# EAGLE board untitle2d (EAGLE 9.6.2)
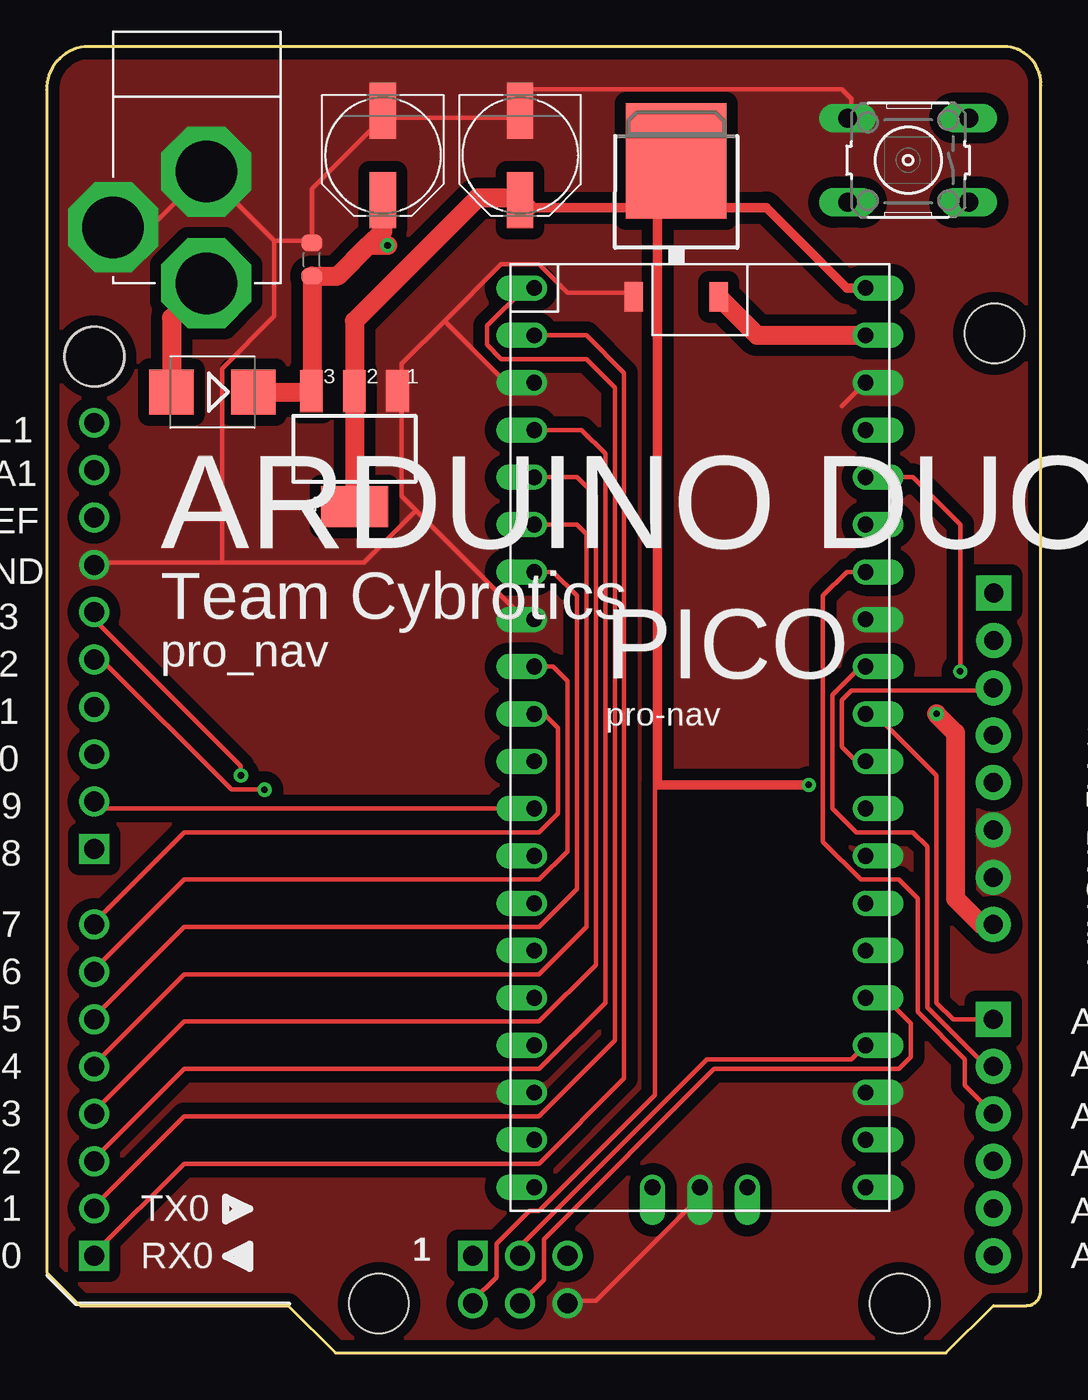
[diagram p0: board, top side]
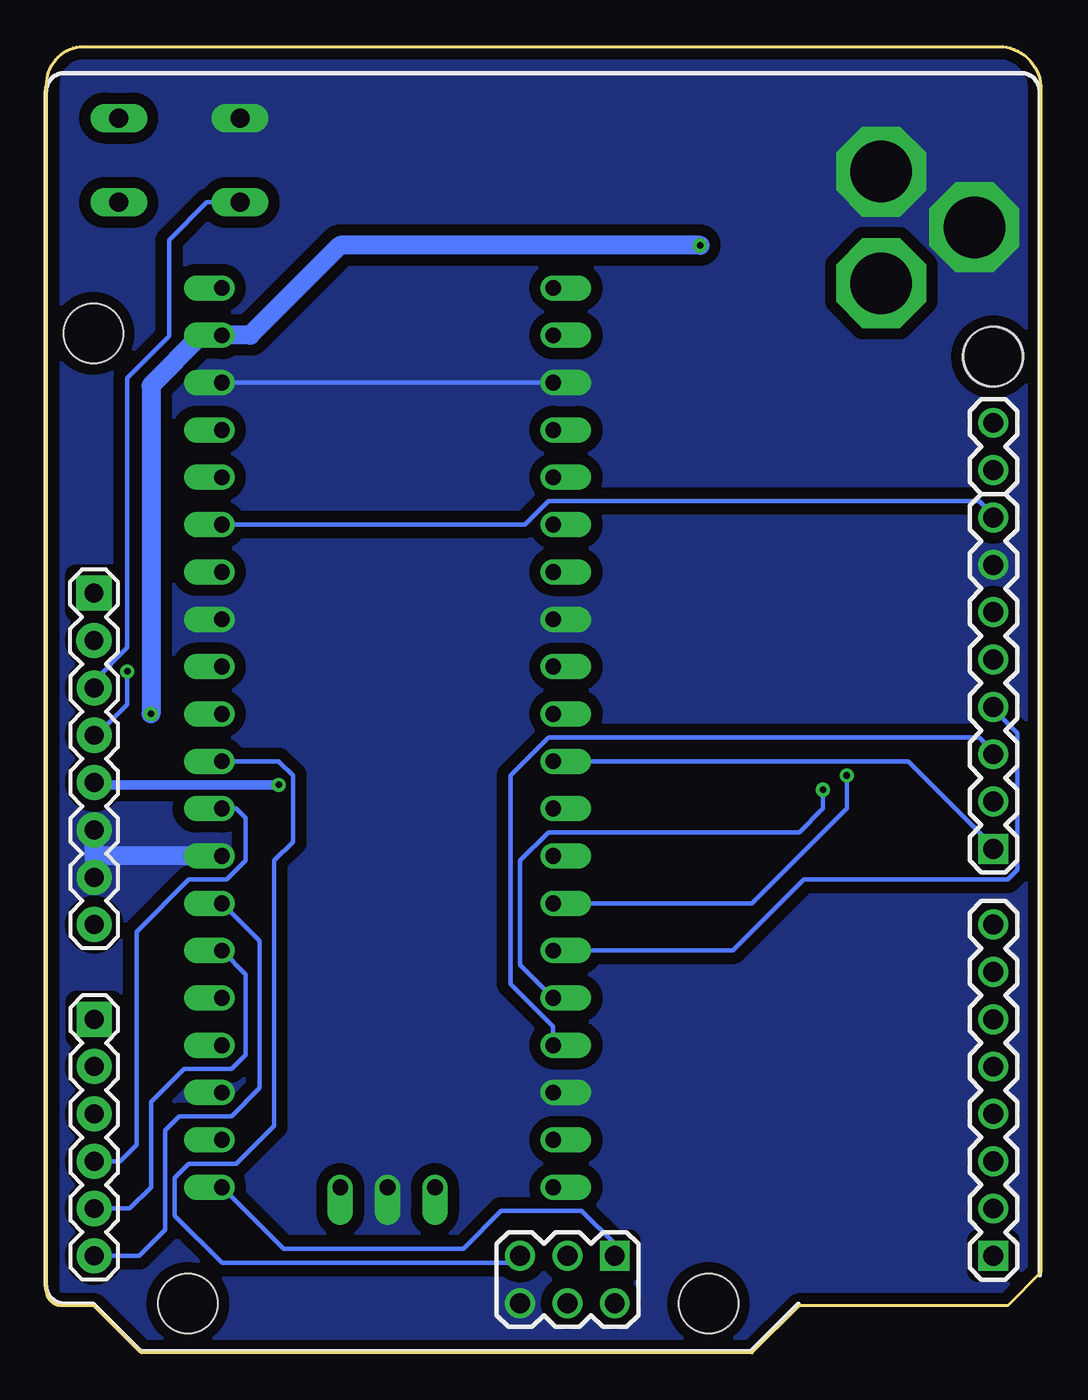
[diagram p1: board, bottom side, seen from below]

Size 53.37 x 70.1 mm. Coordinates in mm from the lower left corner, seen from the top.
Outline: 0.01,4.32 1.79,2.54 12.97,2.54 15.51,0 48.27,0 50.81,2.54 52.59,2.54 arc90 53.35,3.3 53.35,67.82 arc90 51.58,70.1 2.05,70.1 arc90 0.01,67.56 0.01,4.32
Copper layers (1*16): Top 0.035mm / dielectric 1.5mm / Bottom 0.035mm
Design rules "default *": minimum track width 10mil, minimum drill 0.35mm, track to track 10mil, track to pad 10mil, pad to pad 6mil, via to via 6mil, smd to smd 6mil, copper to edge 20mil, drill to drill 10mil, minimum pad ring 10mil, minimum via ring 8mil, stop-mask expansion 4mil, vias tented up to drill 0mil, thermal gap 10mil
Net classes: 0 default: width 0.15 mm, drill 0.3 mm, clearance 0.15 mm

## Footprints (pad centres in the part's own frame; a part is rotated, then mirrored left to right if it is on the bottom)
C0603-ROUND = smd 0.898 x 1.1: 1 -0.889,0; 2 0.889,0
SMB = smd 2.4 x 2.4: A 2.2,0; C -2.2,0
SOT223 = smd 1.219 x 2.235: 1 -2.311,-3.099; 2 0,-3.099; 3 2.311,-3.099 | smd 3.6 x 2.2: 4 0,3.099
DPACK = smd 1 x 1.6: 1 -2.28,-4.8; 3 2.28,-4.8 | smd 5.4 x 6.2: 2 0,2.5
PANASONIC_D = smd 3 x 1.4: + 2.4,0; - -2.4,0
B3F-10XX = drill 1.016 long: 1 -3.251,2.261; 2 3.251,2.261; 3 -3.251,-2.261; 4 3.251,-2.261
ARDUINO_UNO = drill 1.067 square: 0 -27.686,-8.763; 8 -27.686,13.081; MISO -7.366,-8.763 | drill 1.067: 1 -27.686,-6.223; 2 -27.686,-3.683; 3 -27.686,-1.143; 4 -27.686,1.397; 5 -27.686,3.937; 5V_2 -7.366,-11.303; 6 -27.686,6.477; 7 -27.686,9.017; 9 -27.686,15.621; 10 -27.686,18.161; 11 -27.686,20.701; 12 -27.686,23.241; 13 -27.686,25.781; AREF -27.686,30.861; GND_4 -27.686,28.321; GND_5 -2.286,-11.303; MASTER_RESET_SPI -2.286,-8.763; MOSI -4.826,-11.303; SCL1 -27.686,35.941; SDA1 -27.686,33.401; SPCK -4.826,-8.763 | drill 1.016 pad 1.88: 3V3 20.574,19.177; 5V0 20.574,16.637; A1 20.574,1.397; A2 20.574,-1.143; A3 20.574,-3.683; A4 20.574,-6.223; A5 20.574,-8.763; GND 20.574,14.097; GND_1 20.574,11.557; IOREF 20.587,24.264; RESET 20.575,21.717; VIN 20.574,9.017 | drill 1.016 pad 1.88 square: A0 20.574,3.937; NC_2 20.587,26.804 | hole 3.2: -27.686,39.497; -27.635,39.472; 20.625,40.742; -12.395,-11.328; 15.545,-11.328
PICO = drill 0.85 offset: 3V3 8.89,12.7; 3V3_EN 8.89,15.24; ADC_VREF 8.89,10.16; AGND 8.89,5.08; GND 8.89,17.78; GND_0 -8.89,17.78; GND_1 -8.89,-7.62; GND_2 8.89,-20.32; GND_3 8.89,-7.62; GND_4 -8.89,5.08; GND_5 -8.89,-20.32; GND_DEBUG 0,-25.4; GP0 -8.89,22.86; GP1 -8.89,20.32; GP2 -8.89,15.24; GP3 -8.89,12.7; GP4 -8.89,10.16; GP5 -8.89,7.62; GP6 -8.89,2.54; GP7 -8.89,0; GP8 -8.89,-2.54; GP9 -8.89,-5.08; GP10 -8.89,-10.16; GP11 -8.89,-12.7; GP12 -8.89,-15.24; GP13 -8.89,-17.78; GP14 -8.89,-22.86; GP15 -8.89,-25.4; GP16 8.89,-25.4; GP17 8.89,-22.86; GP18 8.89,-17.78; GP19 8.89,-15.24; GP20 8.89,-12.7; GP21 8.89,-10.16; GP22 8.89,-5.08; GP26 8.89,0; GP27 8.89,2.54; GP28 8.89,7.62; RUN 8.89,-2.54; SWCLK -2.54,-25.4; SWDIO 2.54,-25.4; VBUS 8.89,22.86; VSYS 8.89,20.32
DC-21MM = drill 3.302 pad 4.826 octagon: 1 -5.08,-3.353; 2 -0.076,-6.35; 3 -0.076,-0.356

## Placement (x,y rotation side)
C2  100n  [C0603-ROUND]  14.24,58.67 90 top
D1  M7  [SMB]  8.9,51.56 180 top
IC1  MC33269ST-5.0T3  [SOT223]  16.52,48.51 180 top
IC2  MC33269D-5.0  [DPACK]  33.8,61.47 0 top
PC1  47u  [PANASONIC_D]  18.05,64.26 270 top
PC2  47u  [PANASONIC_D]  25.41,64.26 270 top
S1  [B3F-10XX]  46.24,64.01 180 top
U$1  ARDUIN_UNOARDUINO_UNO  [ARDUINO_UNO]  30.24,13.97 0 top
U$2  PICO  [PICO]  35.07,34.29 0 top
X1  DC21MMX  [DC-21MM]  8.65,63.75 0 top

## Library data of the parts
C2 = SmartPrj
D1 = diode
IC1 IC2 = linear
PC1 PC2 = rcl
S1 = switch-omron; MPN: B3F-1000; OC_FARNELL: 176432; OC_NEWARK: 36M3542
U$1 U$2 = parts
X1 = powersupply

## Nets
3V3_EN: U$2.3V3_EN
+5V: IC1.2 IC1.4 IC2.2 PC2.+ U$1.5V0 U$1.5V_2 U$2.VBUS
GND: C2.2 IC1.1 IC2.1 PC1.- PC2.- S1.4 U$1.GND U$1.GND_1 U$1.GND_4 U$1.GND_5 U$2.AGND U$2.GND U$2.GND_0 U$2.GND_2 U$2.GND_3 U$2.GND_4 U$2.GND_5 U$2.GND_DEBUG X1.1 X1.3
N$1: U$1.1 U$2.GP0
N$2: U$1.0 U$2.GP1
N$3: U$1.2 U$2.GP2
N$4: U$1.3 U$2.GP3
N$5: U$1.A5 U$2.GP21
N$6: U$1.A4 U$2.GP20
N$7: U$1.4 U$2.GP4
N$8: U$1.A3 U$2.GP22
N$9: U$1.3V3 U$2.3V3
N$10: U$1.AREF U$2.ADC_VREF
N$11: U$1.5 U$2.GP5
N$12: U$1.6 U$2.GP6
N$13: U$1.7 U$2.GP7
N$14: U$1.8 U$2.GP8
N$15: U$1.13 U$2.GP10
N$16: U$1.10 U$2.GP13
N$17: U$1.12 U$2.GP12
N$18: U$1.9 U$2.GP9
N$19: U$1.11 U$2.GP11
N$20: U$1.A0 U$2.GP26
N$21: U$1.A1 U$2.GP27
N$22: U$1.A2 U$2.GP28
N$23: S1.2 U$1.MASTER_RESET_SPI U$1.RESET U$2.RUN
PWRIN: D1.A X1.2
S$1: U$1.SPCK U$2.GP18
S$2: U$1.MISO U$2.GP16
S$3: U$1.MOSI U$2.GP19
VIN: C2.1 D1.C IC1.3 IC2.3 PC1.+ U$1.VIN U$2.VSYS

## Tracks (layer width: path | path; a pad name or v marks a point on that pad's centre or on a via)
+5V  (via drill 0.35)
  Top 0.254: U$1.5V_2 22.87,2.79 24.14,4.06 24.14,5.84 25.92,7.62 26.43,7.62 32.65,13.84 32.65,30.35 32.78,30.48 | 32.78,61.76 IC2.2
  Top 0.508: 25.81,61.47 34.05,61.47 | 35.57,61.47 38.62,61.47 42.94,57.15 U$2.VBUS | 32.78,61.76 32.78,30.48 v40.91,30.48
  Top 1.016: 25.81,61.47 PC2.+ 25.3,61.98 23.13,61.98 16.52,55.37 IC1.2 IC1.4 | 34.05,61.47 34.05,63.71 IC2.2 35.57,62.19 35.57,61.47
  Bottom 0.508: v40.91,30.48 50.81,30.48 U$1.5V0
GND
  Top 0.254: 18.05,66.29 25.41,66.29 PC2.- 25.41,67.68 25.55,67.82 42.69,67.82 43.19,67.31 43.19,66.47 S1.4 | 12.21,59.69 14.24,59.69 | 12.21,59.69 8.65,63.25 X1.3 8.4,63.25 5.6,60.45 3.57,60.45 X1.1 | 18.05,66.29 PC1.- | 18.05,66.29 14.24,62.48 14.24,59.69 | 14.24,59.69 C2.2 | 21.35,55.37 19.06,53.09 19.06,51.82 IC1.1 19.06,51.56 19.06,45.97 19.83,45.21 | 21.35,55.37 24.4,58.42 26.43,58.42 27.95,56.9 31.51,56.9 IC2.1 | U$2.GND_4 25.67,39.37 19.83,45.21 | U$2.GND_0 24.65,52.07 21.35,55.37 | 9.41,42.42 17.03,42.42 19.83,45.21 | 9.41,42.42 2.55,42.42 U$1.GND_4 | 12.21,59.69 12.21,55.63 9.41,52.83 9.41,42.42 | U$2.GND 42.69,50.8 | U$2.GND_DEBUG 35.07,8.38 29.48,2.79 27.95,2.79 U$1.GND_5
  Bottom 0.254: U$2.GND U$2.GND_0
  Bottom 1.016: U$2.GND_3 50.81,26.67 | 50.81,26.67 U$1.GND | 50.81,26.67 U$1.GND_1
  pour Bottom (isolate 0.61, no thermals): -4.3,72.64 -4.3,2.79 0.27,-1.78 6.62,-1.78 55.89,-1.78 63.01,5.33 63.01,13.97 63.01,67.82 58.94,71.88 57.93,72.9 -4.56,72.9
  pour Top (isolate 0.61, no thermals): -3.03,70.36 -3.03,3.81 -0.75,1.52 2.55,-1.78 51.07,-1.78 55.64,-1.78 60.47,3.05 60.47,67.56 59.45,68.58 56.66,71.37 31.76,71.37 -2.27,71.37 -3.29,70.36 -3.29,70.1
N$1
  Top 0.254: U$2.GP0 25.67,57.15 23.64,55.12 23.64,54.1 24.4,53.34 28.97,53.34 30.49,51.82 30.49,16.76 26.43,12.7 7.38,12.7 2.55,7.87 U$1.1
N$2
  Top 0.254: U$2.GP1 28.97,54.61 31,52.58 31,14.73 26.43,10.16 7.38,10.16 2.55,5.33 U$1.0
N$3
  Top 0.254: U$2.GP2 28.72,49.53 29.99,48.26 29.99,18.8 26.43,15.24 7.38,15.24 2.55,10.41 U$1.2
N$4
  Top 0.254: U$2.GP3 28.46,46.99 29.48,45.97 29.48,20.83 26.43,17.78 7.38,17.78 2.55,12.95 U$1.3
N$5
  Bottom 0.254: U$2.GP21 41.92,22.1 41.92,14.22 43.45,12.7 46.24,12.7 47,11.94 47,6.6 48.4,5.21 U$1.A5
N$6
  Bottom 0.254: U$2.GP20 42.69,20.32 42.69,16 43.45,15.24 45.99,15.24 47.77,13.46 47.77,8.89 48.91,7.75 U$1.A4
N$7
  Top 0.254: U$2.GP4 28.46,44.45 28.97,43.94 28.97,22.86 26.43,20.32 7.38,20.32 2.55,15.49 U$1.4
N$8
  Bottom 0.254: U$1.A3 49.42,10.29 48.53,11.18 48.53,22.61 45.73,25.4 43.7,25.4 42.69,26.42 42.69,28.7 43.19,29.21 U$2.GP22
N$9  (via drill 0.35)
  Top 0.254: U$2.3V3 46.5,46.99 49.04,44.45 v49.04,36.58
  Bottom 0.254: v49.04,36.58 49.04,34.8 50.56,33.27 50.81,33.27 U$1.3V3
N$10
  Bottom 0.254: U$2.ADC_VREF 27.7,44.45 26.43,45.72 3.32,45.72 2.55,44.96 U$1.AREF
N$11
  Top 0.254: U$2.GP5 27.19,41.91 28.46,40.64 28.46,24.89 26.43,22.86 7.38,22.86 2.55,18.03 U$1.5
N$12
  Top 0.254: U$2.GP6 27.19,36.83 27.95,36.07 27.95,26.92 26.43,25.4 7.38,25.4 2.55,20.57 U$1.6
N$13
  Top 0.254: U$2.GP7 26.68,34.29 27.45,33.53 27.45,28.96 26.43,27.94 7.38,27.94 2.55,23.11 U$1.7
N$14
  Bottom 0.254: U$2.GP8 7.13,31.75 2.55,27.18 U$1.8
N$15  (via drill 0.35)
  Top 0.254: U$1.13 2.55,39.37 10.43,31.5 v10.43,30.99
  Bottom 0.254: U$2.GP10 15.51,24.13 10.43,29.21 v10.43,30.99
N$16
  Bottom 0.254: U$2.GP13 26.18,17.53 28.46,19.81 28.46,30.99 26.43,33.02 3.32,33.02 2.55,32.26 U$1.10
N$17  (via drill 0.35)
  Top 0.254: v11.7,30.23 9.92,30.23 2.93,37.21 U$1.12
  Bottom 0.254: U$2.GP12 27.95,20.83 27.95,26.42 26.43,27.94 12.97,27.94 11.7,29.21 v11.7,30.23
N$18
  Top 0.254: U$2.GP9 2.81,29.21 2.55,29.46 U$1.9
N$19
  Bottom 0.254: U$2.GP11 16.52,21.59 12.71,25.4 1.79,25.4 1.28,25.91 1.28,33.27 2.55,34.54 U$1.11
N$20
  Top 0.254: U$2.GP26 44.46,34.29 47.77,30.99 47.77,18.8 48.65,17.91 U$1.A0
N$21
  Top 0.254: U$1.A1 50.43,15.37 47.26,18.54 47.26,27.18 46.5,27.94 43.45,27.94 42.18,29.21 42.18,35.31 43.7,36.83 U$2.GP27
N$22
  Top 0.254: U$2.GP28 42.94,41.91 41.67,40.64 41.67,27.43 43.7,25.4 45.73,25.4 46.75,24.38 46.75,18.29 49.29,15.75 49.29,14.35 U$1.A2
N$23
  Top 0.254: U$2.RUN 43.45,31.75 42.69,32.51 42.69,35.05 43.19,35.56 50.81,35.56 U$1.RESET
  Bottom 0.254: S1.2 44.77,61.75 46.8,59.71 46.8,54.56 49.04,52.32 49.04,37.85 50.81,36.07 U$1.RESET | U$1.MASTER_RESET_SPI 28.33,4.83 43.96,4.83 46.5,7.37 46.5,9.4 45.73,10.16 43.19,10.16 41.16,12.19 41.16,26.42 40.15,27.43 40.15,30.99 40.91,31.75 U$2.RUN
PWRIN
  Top 1.016: X1.2 6.7,55.53 D1.A
S$1
  Top 0.254: U$1.SPCK 25.41,5.72 35.45,15.75 43.19,15.75 U$2.GP18
S$2
  Bottom 0.254: U$1.MISO 22.87,5.84 24.65,7.62 28.97,7.62 31,5.59 40.65,5.59 U$2.GP16
S$3
  Top 0.254: U$1.MOSI 26.68,3.94 26.68,6.1 35.83,15.24 45.73,15.24 46.39,15.9 46.39,17.68 45.02,19.05 U$2.GP19
VIN  (via drill 0.35)
  Top 1.016: D1.C 14.16,51.56 IC1.3 14.24,51.64 C2.1 15.63,57.78 17.29,59.44 | IC2.3 38.13,54.61 U$2.VSYS | PC1.+ 18.05,60.2 17.29,59.44 | 17.29,59.44 v18.3,59.44 | v47.77,34.29 48.78,33.27 48.78,24.38 50.18,22.99 U$1.VIN
  Bottom 1.016: v18.3,59.44 37.61,59.44 42.43,54.61 U$2.VSYS 45.07,54.61 47.77,51.91 v47.77,34.29